# EAGLE board Telescope_Interface_shield (EAGLE 9.6.2)
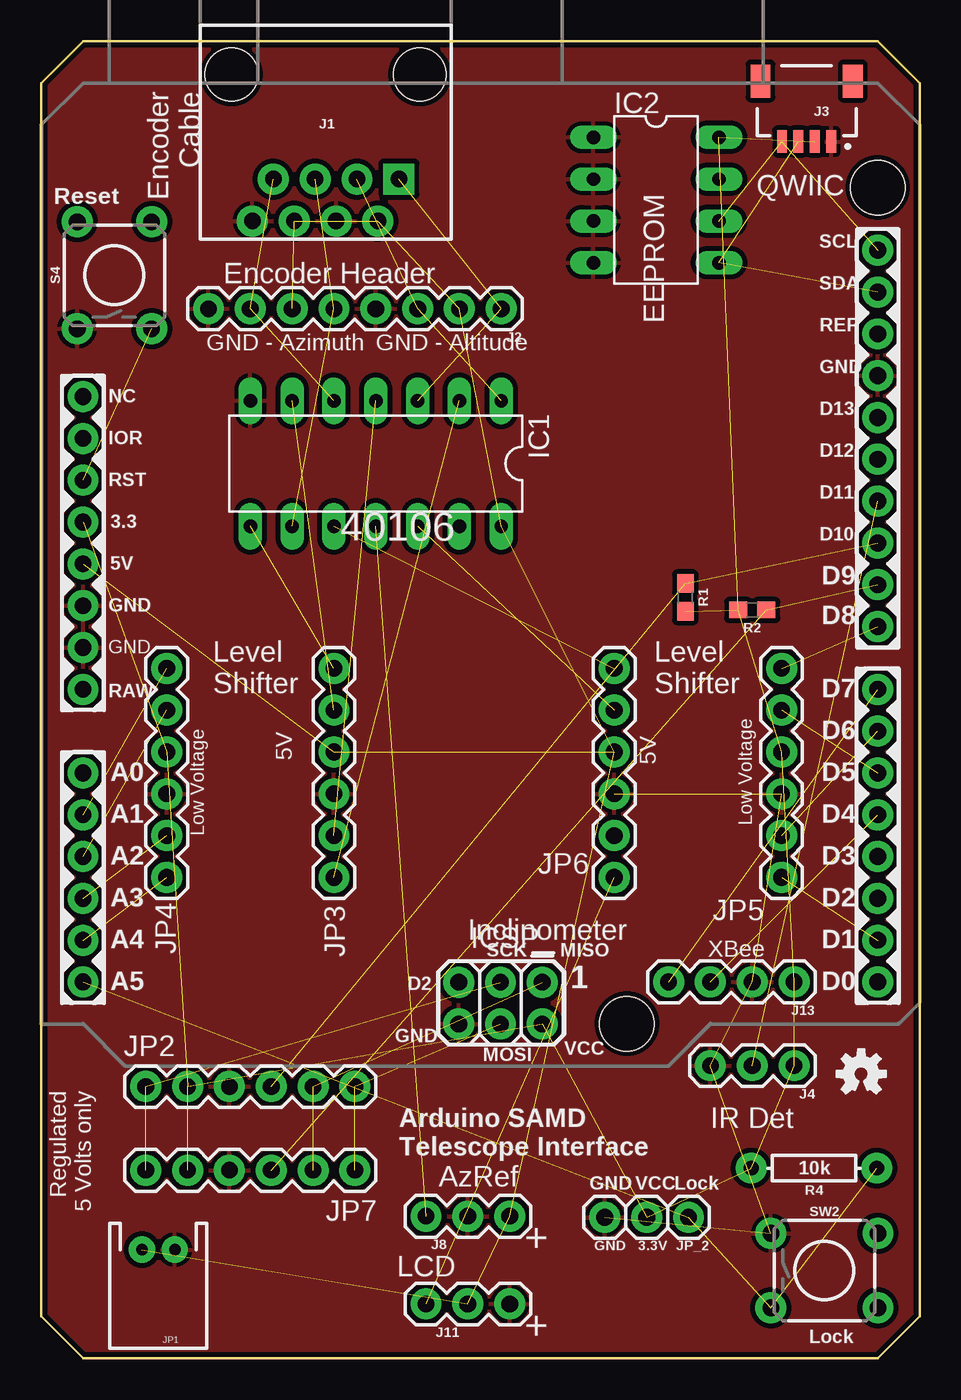
[diagram p0: board, top side]
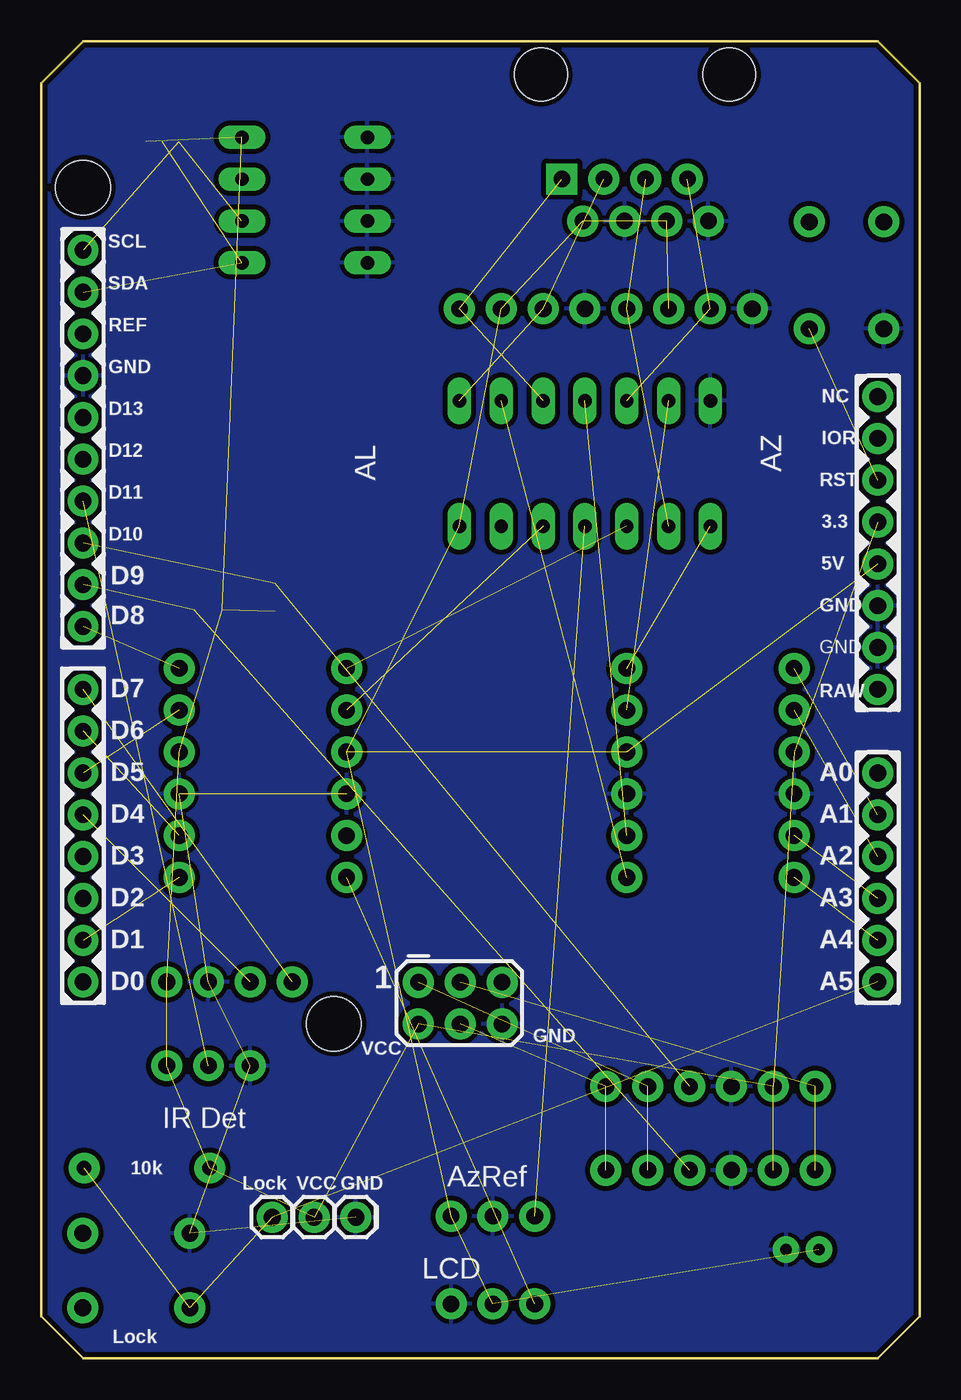
[diagram p1: board, bottom side, seen from below]

Size 53.34 x 80.01 mm. Coordinates in mm from the lower left corner, seen from the top.
Outline: 2.54,0 50.8,0 53.34,2.54 53.34,77.47 50.8,80.01 2.54,80.01 0,77.47 0,2.54 2.54,0
Copper layers (1*16): Top 0.035mm / dielectric 1.5mm / Bottom 0.035mm
Design rules "SparkFun": minimum track width 8mil, minimum drill 20mil, track to track 8mil, track to pad 8mil, pad to pad 8mil, via to via 8mil, smd to smd 8mil, copper to edge 8mil, drill to drill 8mil, minimum pad ring 12mil, minimum via ring 10mil, stop-mask expansion 4mil, vias tented up to drill 20mil, thermal gap 10mil
Net classes: 0 default: clearance 0.205 mm; 1 power: width 0.254 mm, clearance 0.205 mm to class 0, clearance 0.205 mm

## Footprints (pad centres in the part's own frame; a part is rotated, then mirrored left to right if it is on the bottom)
1X01 = drill 1.016 pad 1.88: 1 0,0
DIL14 = drill 0.813 long: 1 -7.62,-3.81; 2 -5.08,-3.81; 3 -2.54,-3.81; 4 0,-3.81; 5 2.54,-3.81; 6 5.08,-3.81; 7 7.62,-3.81; 8 7.62,3.81; 9 5.08,3.81; 10 2.54,3.81; 11 0,3.81; 12 -2.54,3.81; 13 -5.08,3.81; 14 -7.62,3.81
DIL8 = drill 0.813 long: 1 -3.81,-3.81; 2 -1.27,-3.81; 3 1.27,-3.81; 4 3.81,-3.81; 5 3.81,3.81; 6 1.27,3.81; 7 -1.27,3.81; 8 -3.81,3.81
2X3 = drill 1.016 pad 1.88: 1 0,0; 2 0,2.54; 3 2.54,0; 4 2.54,2.54; 5 5.08,0; 6 5.08,2.54
RJ45-8 = drill 1 pad 1.88 square: 1 -4.445,6.35 | drill 1 pad 1.88: 2 -3.175,8.89; 3 -1.905,6.35; 4 -0.635,8.89; 5 0.635,6.35; 6 1.905,8.89; 7 3.175,6.35; 8 4.445,8.89 | hole 3.2: -5.715,0; 5.715,0
1X08 = drill 1.016 pad 1.88: 1 0,0; 2 2.54,0; 3 5.08,0; 4 7.62,0; 5 10.16,0; 6 12.7,0; 7 15.24,0; 8 17.78,0
JST04_1MM_RA = smd 0.6 x 1.35: 1 -1.5,0; 2 -0.5,0; 3 0.5,0; 4 1.5,0 | smd 1.2 x 2: NC1 2.8,-3.675; NC2 -2.8,-3.675
1X03 = drill 1.016 pad 1.88: 1 0,0; 2 2.54,0; 3 5.08,0
1X04 = drill 1.016 pad 1.88: 1 0,0; 2 2.54,0; 3 5.08,0; 4 7.62,0
JST-2-PTH = drill 0.7 pad 1.6: 1 -1,0; 2 1,0
1X06 = drill 1.016 pad 1.88: 1 0,0; 2 2.54,0; 3 5.08,0; 4 7.62,0; 5 10.16,0; 6 12.7,0
UNO_R3_PROTO_SHIELD = drill 1.016 pad 1.88: 3.3V 50.8,26.67; 5V 50.8,29.21; A0 50.8,41.91; A1 50.8,44.45; A2 50.8,46.99; A3 50.8,49.53; A4 50.8,52.07; A5 50.8,54.61; AREF 2.54,15.24; D2 2.54,49.53; D3 2.54,46.99; D4 2.54,44.45; D5 2.54,41.91; D6 2.54,39.37; D7 2.54,36.83; D8 2.54,33.02; D9 2.54,30.48; D10 2.54,27.94; D11 2.54,25.4; D12 2.54,22.86; D13 2.54,20.32; GND@0 50.8,31.75; GND@1 50.8,34.29; GND@2 2.54,17.78; IOREF 50.8,21.59; NC 50.8,19.05; RES 50.8,24.13; RX 2.54,54.61; SCL 2.54,10.16; SDA 2.54,12.7; TX 2.54,52.07; VIN 50.8,36.83 | hole 3.302: 2.54,6.35; 17.78,57.15
0603 = smd 1.1 x 1: 1 -0.85,0; 2 0.85,0
AXIAL-0.3 = drill 0.9 pad 1.88: P$1 -3.81,0; P$2 3.81,0
TACTILE_SWITCH_PTH_6.0MM = drill 1.016 pad 1.88: 1 -3.251,2.261; 2 3.251,2.261; 3 -3.251,-2.261; 4 3.251,-2.261

## Placement (x,y rotation side)
3.3V  [1X01]  36.77,8.57 180 top
FRAME1  FRAME-LETTER  [CREATIVE_COMMONS]  -2.01,-13.08 0 top  (outside the outline)
GND  [1X01]  34.23,8.57 180 top
IC1  40106N  [DIL14]  20.32,54.36 180 top
IC2  24LC256P  [DIL8]  37.34,70.36 270 top
ICSP  ICSP  [2X3]  30.43,22.85 180 top
J1  RJ45  [RJ45-8]  17.27,77.98 180 top
J2  [1X08]  27.94,63.75 180 top
J3  [JST04_1MM_RA]  46.48,73.91 180 top
J4  455-1750-1-ND  [1X03]  45.72,17.78 180 top
J8  455-1750-1-ND  [1X03]  28.45,8.64 180 top
J11  455-1750-1-ND  [1X03]  28.45,3.3 180 top
J13  [1X04]  45.72,22.86 180 top
JP1  [JST-2-PTH]  7.11,6.6 180 top
JP2  [1X06]  6.35,16.51 0 top
JP3  [1X06]  17.78,41.91 270 top
JP4  [1X06]  7.62,29.21 90 top
JP5  [1X06]  44.96,29.21 90 top
JP6  [1X06]  34.8,41.91 270 top
JP7  [1X06]  19.05,11.43 180 top
JP8  ARDUINO_R3_SHIELDR3_PROTO_SHIELD  [UNO_R3_PROTO_SHIELD]  53.34,77.47 180 top
JP_2  [1X01]  39.31,8.57 180 top
LOGO1  OSHW-LOGOS  [OSHW-LOGO-S]  49.78,17.27 0 top
R1  4.7k  [0603]  39.12,46.23 270 top
R2  4.7k  [0603]  43.18,45.47 180 top
R4  10k  [AXIAL-0.3]  46.93,11.56 180 top
S4  MOMENTARY-SWITCH-SPST-PTH-6.0MM  [TACTILE_SWITCH_PTH_6.0MM]  4.45,65.79 90 top
SW2  MOMENTARY-SWITCH-SPST-PTH-6.0MM  [TACTILE_SWITCH_PTH_6.0MM]  47.56,5.33 0 top

## Library data of the parts
3.3V GND ICSP JP_2 = SparkFun-Connectors
FRAME1 = SparkFun-Aesthetics; DESIGNER: NotDavid4JustDavid; REV: v1
IC1 = 40xx
IC2 = microchip; MF: MICROCHIP; MPN: 24LC256-E/P; OC_FARNELL: 9757970; OC_NEWARK: 92C7169
J1 = SparkFun-Connectors; PROD_ID: CONN-08506; SF_ID: PRT-00643
J2 = SparkFun-Connectors; PROD_ID: CONN-08438
J3 = SparkFun-Connectors; PROD_ID: CONN-13694
J4 J8 J11 = SparkFun-Connectors; PROD_ID: XXX-00000
J13 = SparkFun-Connectors; PROD_ID: CONN-09696
JP1 = SparkFun-Connectors; PROD_ID: CONN-09863; SKU: PRT-09914
JP2-JP7 = SparkFun
JP8 = TempLibrary
LOGO1 = SparkFun-Aesthetics
R1 R2 = SparkFun-Resistors; PROD_ID: RES-07857
R4 = SparkFun-Resistors; PROD_ID: RES-09435
S4 SW2 = SparkFun-Switches; PROD_ID: SWCH-08441; SF_SKU: COM-00097

## Nets
3.3V [power]: 3.3V.1 IC2.8 ICSP.2 J3.2 J4.1 J13.1 JP2.2 JP4.4 JP5.4 JP7.5 JP8.3.3V R1.2 R2.2 R4.P$2
5V [power]: IC1.14 J1.2 J1.6 J2.2 J2.6 J8.1 J11.2 JP1.2 JP3.3 JP6.3 JP8.5V
A0: JP8.A0
A1: JP4.6 JP8.A1
A2: JP4.5 JP8.A2
A3: JP4.2 JP8.A3
A4: JP4.1 JP8.A4
A5: JP8.A5 JP_2.1 R4.P$1 SW2.3
AL_A: IC1.4 JP3.5
AL_B: IC1.2 JP3.6
AREF: JP8.AREF
AZ_A: IC1.6 JP3.2
AZ_B: IC1.8 JP3.1
AZREF: IC1.11 J8.3
D2: JP8.D2
D3: JP8.D3
D4: J13.3 JP8.D4
D5: JP5.5 JP8.D5
D6: JP5.2 JP8.D6
D7: J13.4 JP8.D7
D8: JP5.6 JP8.D8
D9: JP7.3 JP8.D9 R2.1
D10: JP2.4 JP8.D10 R1.1
D11: J4.2 JP8.D11
D12: JP8.D12
D13: JP8.D13
GND [power]: GND.1 IC1.7 IC2.1 IC2.2 IC2.3 IC2.4 ICSP.6 J1.4 J1.8 J2.4 J2.8 J3.1 J4.3 J8.2 J11.1 J13.2 JP1.1 JP2.3 JP3.4 JP4.3 JP5.3 JP6.4 JP7.4 JP8.GND@0 JP8.GND@1 JP8.GND@2 S4.1 SW2.1
HORIZON: IC1.13
HV1: IC1.10 JP6.1
HV2: IC1.12 JP6.2
LCD: J11.3 JP6.6
MISO: ICSP.1 JP2.5 JP7.2
MOSI: ICSP.4 JP2.6 JP7.1
N$6: IC1.3 J1.1 J2.1
N$7: IC1.1 J1.3 J2.3
N$10: IC1.5 J1.7 J2.7
N$11: IC1.9 J1.5 J2.5
REF: JP8.IOREF
RESET: JP8.RES S4.3
RX: JP8.RX
SCK: ICSP.3 JP2.1 JP7.6
SCL: IC2.6 J3.4 JP8.SCL
SDA: IC2.5 J3.3 JP8.SDA
TX: JP5.1 JP8.TX
VIN: JP8.VIN
ZENITH: JP6.5

## Tracks (layer width: path | path; a pad name or v marks a point on that pad's centre or on a via)
3.3V  (13 unrouted)
5V  (10 unrouted)
A1  (1 unrouted)
A2  (1 unrouted)
A3  (1 unrouted)
A4  (1 unrouted)
A5  (3 unrouted)
AL_A  (1 unrouted)
AL_B  (1 unrouted)
AZ_A  (1 unrouted)
AZ_B  (1 unrouted)
AZREF  (1 unrouted)
D4  (1 unrouted)
D5  (1 unrouted)
D6  (1 unrouted)
D7  (1 unrouted)
D8  (1 unrouted)
D9  (2 unrouted)
D10  (2 unrouted)
D11  (1 unrouted)
GND  (5 unrouted)
  pour Top (isolate 0.305): 53.34,0 0,0 0,80.01 53.34,80.01
  pour Bottom (isolate 0.305): 53.34,0 0,0 0,80.01 53.34,80.01
HV1  (1 unrouted)
HV2  (1 unrouted)
LCD  (1 unrouted)
MISO  (2 unrouted)
MOSI  (2 unrouted)
N$6  (2 unrouted)
N$7  (2 unrouted)
N$10  (2 unrouted)
N$11  (2 unrouted)
RESET  (1 unrouted)
SCK  (2 unrouted)
SCL  (2 unrouted)
SDA  (2 unrouted)
TX  (1 unrouted)

## Text on the board
Unrouted: Rocker | Tube
tPlace: QWIIC | EEPROM | Reset | Encoder / Cable | SCL | Encoder Header | SDA | REF | GND - Azimuth | GND - Altitude | GND | NC | D13 | IOR | D12 | RST | D11 | 3.3 | 40106 | D10 | 5V | D9 | GND | D8 | GND | RAW | Level / Shifter | Level / Shifter | D7 | D6 | 5V | 5V | A0 | D5 | A1 | D4 | Low Voltage | Low Voltage | A2 | D3 | A3 | D2 | A4 | Inclinometer | XBee | D1 | SCK | MISO | A5 | D2 | 1 | D0 | GND | MOSI | VCC | Regulated / 5 Volts only | IR Det | Arduino SAMD / Telescope Interface | 10k | AzRef | GND | VCC | Lock | + | LCD | Lock | +
bPlace: SCL | SDA | REF | GND | NC | D13 | IOR | AL | D12 | AZ | RST | D11 | 3.3 | D10 | 5V | D9 | GND | D8 | GND | RAW | D7 | D6 | A0 | D5 | A1 | D4 | A2 | D3 | A3 | D2 | A4 | D1 | A5 | 1 | D0 | GND | VCC | IR Det | 10k | AzRef | GND | VCC | Lock | LCD | Lock
Measures: Dimensions in Inches